# Altium PCB board.PcbDoc
Units mm, origin at the board's own origin, x right, y up, seen from the top; angles counter-clockwise.
Board outline 48.75 x 18.5 mm, 2 copper layers (Top Layer, Bottom Layer), stack 1.57 mm thick; 63 components, 46 nets, 233 pads, 90 vias.
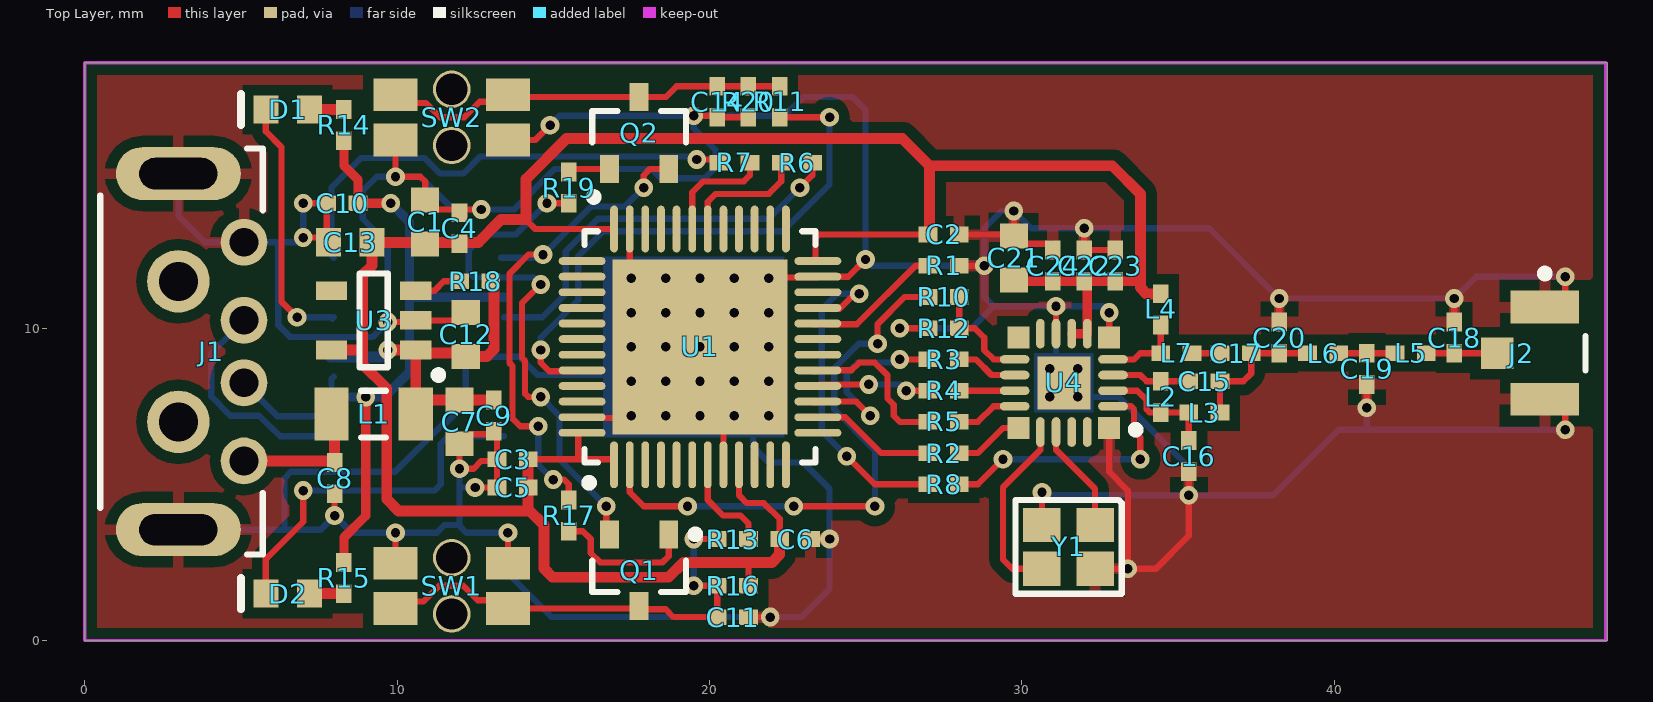
[diagram p0: Top Layer view]
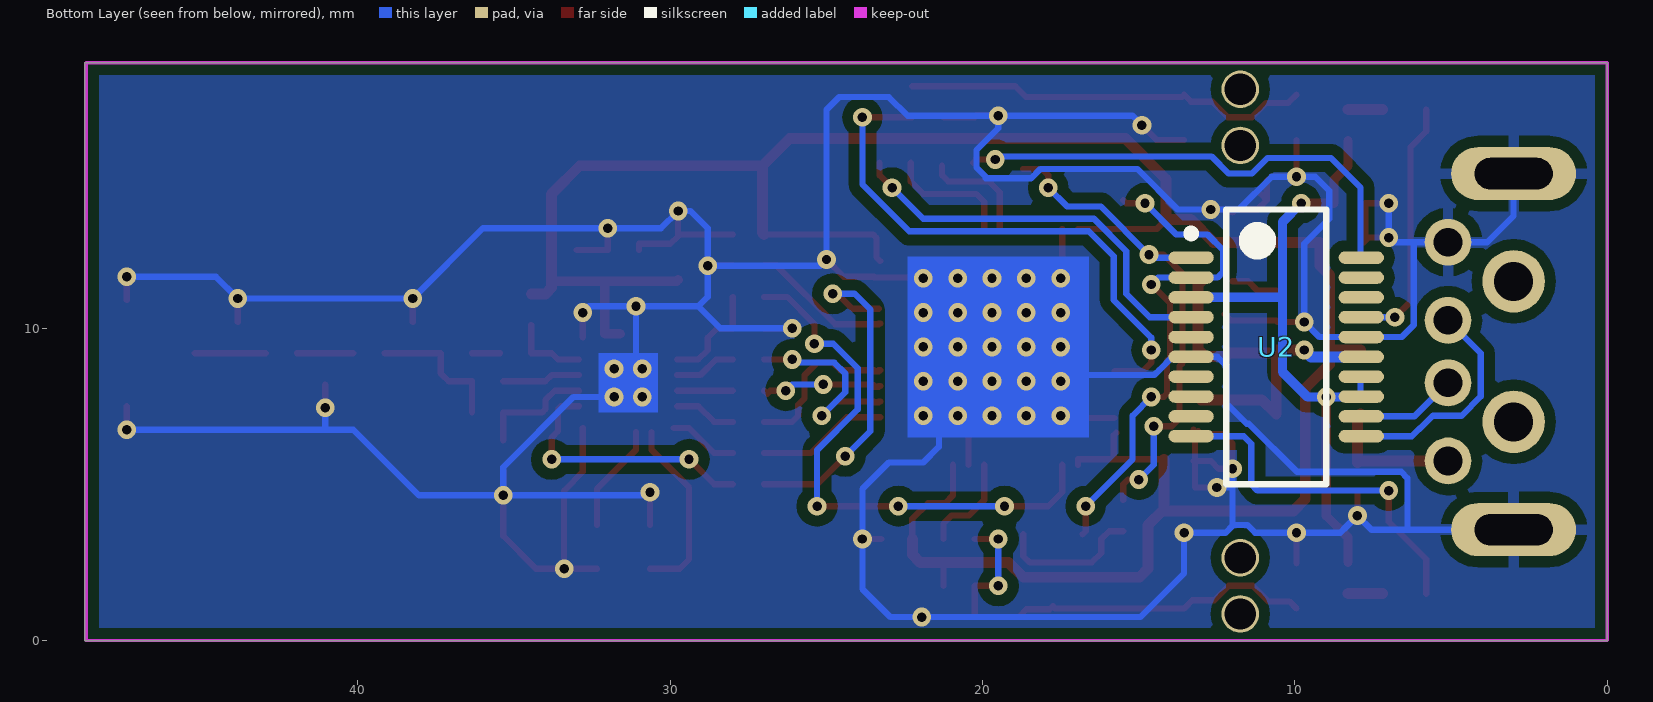
[diagram p1: Bottom Layer view, seen from below]
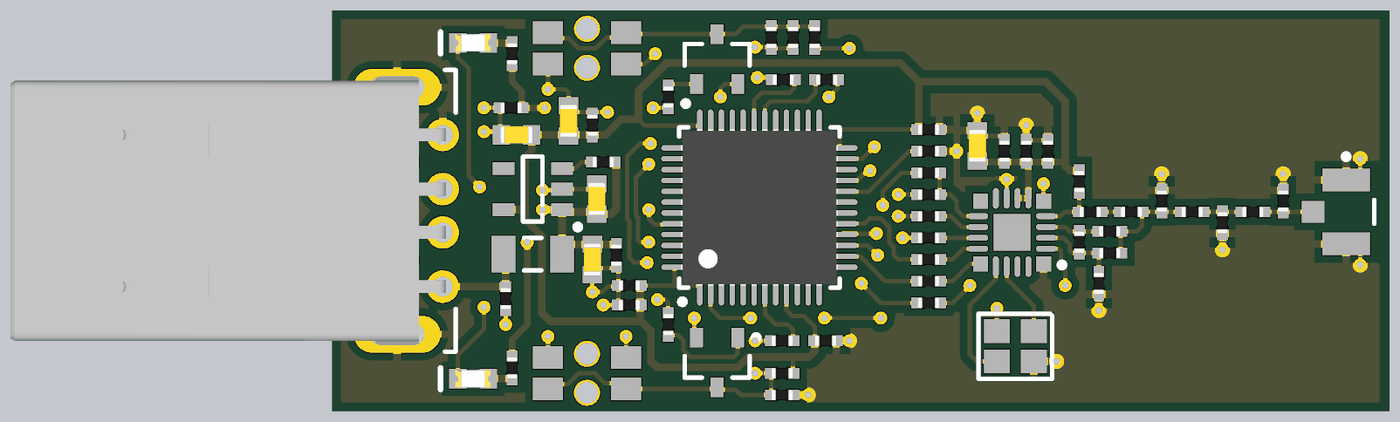
[diagram p2: 3D render of the assembled board from above, using the file's embedded part models]

## Layer stack, top to bottom
Top Solder: solder mask 0.01, Solder Resist, Dk 3.5
Top Layer: signal copper 0.035
Dielectric1: core 1.5, FR-4, Dk 4.2
Bottom Layer: signal copper 0.035
Bottom Solder: solder mask 0.01, Solder Resist, Dk 3.5

## Board outline
0,0 0,18.5 48.75,18.5 48.75,0

## Design rules (kind name [scope] priority, off if disabled: settings)
AssemblyTestPointUsage [All] p1 off:
Clearance [All] p1: gap=0.2 ignorepadtopadclearanceinfootprint=FALSE except(0.35: Arc-Fill Arc-Poly Arc-Region Track-Fill Track-Poly Track-Region SMDPad-Fill SMDPad-Poly SMDPad-Region THPad-Fill THPad-Poly THPad-Region Via-Fill Via-Poly Via-Region Fill-Fill Fill-Poly Fill-Region Poly-Poly Poly-Region Region-Region)
ComponentClearance ComponentClearance_logo [HasFootprint('Develer_logo_30x12mm_PCB_NOTE') vs HasFootprint('Develer_logo_30x12mm_TB_Top')] p1: gap=0 collisioncheckmode=3 verticalgap=0 showdistances=FALSE
ComponentClearance [All] p2: gap=0.25 collisioncheckmode=3 verticalgap=0.25 showdistances=FALSE
DiffPairsRouting [All] p1: maxlimit=0.2 minlimit=0.2 mostfreqgap=0.2 toplayer_minwidth=0.2 toplayer_maxwidth=0.2 toplayer_prefwidth=0.2 bottomlayer_minwidth=0.2 bottomlayer_maxwidth=0.2 bottomlayer_prefwidth=0.2 maxuncoupledlength=12.7
FabricationTestPointUsage [All] p1 off: valid=0 allowmultiple=FALSE
Height [All] p1: minheight=0 maxheight=25 prefheight=12.5
HoleSize [All] p1: absolutevalues=TRUE maxlimit=10 minlimit=0.2 maxpercent=80.000 minpercent=20.000
HoleToHoleClearance [All] p1: gap=0.25 allowstackedmicrovias=TRUE
MinimumSolderMaskSliver [All] p1: minsoldermaskwidth=0.1
PlaneClearance [All] p1: clearance=0.5
PlaneConnect PlaneConnect_via [isvia] p1: planeconnectstyle=Direct reliefexpansion=0.508 reliefentries=4 reliefconductorwidth=0.254 reliefairgap=0.254
PlaneConnect [All] p2: planeconnectstyle=Relief reliefexpansion=0.6 reliefentries=4 reliefconductorwidth=0.6 reliefairgap=0.3
PolygonConnect PolygonConnect_via [isvia] p1: connectstyle=Direct reliefconductorwidth=0.254 reliefentries=4 polygonreliefangle="90 Angle" airgapwidth=0.254
PolygonConnect [All] p2: connectstyle=Relief reliefconductorwidth=0.35 reliefentries=4 polygonreliefangle="90 Angle" airgapwidth=0.35
RoutingCorners [All] p1: cornerstyle=45-Degree minsetback=2.5 maxsetback=2.5
RoutingVias [All] p1: holewidth=0.3 width=0.6 viastyle="Through Hole" minholewidth=0.2 minwidth=0.3 maxholewidth=0.5 maxwidth=1
SilkToSilkClearance [All] p1: silktosilkclearance=0.15
SilkToSolderMaskClearance [IsPad] p1: minsilkscreentomaskgap=0.15 clearancetoexposedcopper=TRUE
SolderMaskExpansion SolderMaskExpansion_via [isVia] p1: expansion=-10
SolderMaskExpansion [All] p2: expansion=0.05
UnRoutedNet [All] p1: checkbadconnections=TRUE
Width [All] p1: maxlimit=5 minlimit=0.15 preferedwidth=0.2
16 further rules are at their usual default settings.

## Classes and differential pairs
component class radio: C15 C16 C17 C18 C19 C20 C21 C22 C23 C24 J2 L2 L3 L4 L5 L6 L7 U4 Y1
component class power: C7 C8 C9 C10 C11 C12 C13 C14 D1 D2 J1 L1 Q1 Q2 R14 R15 R16 R17 R18 R19 R20 SW1 SW2 U3
component class microcontroller: C1 C2 C3 C4 C5 C6 R1 R2 R3 R4 R5 R6 R7 R8 R10 R11 R12 R13 U1
differential pair usb: +usb_p -usb_n

## Components (designator, comment, footprint, x,y, rotation, side; value= is the part's Value field where it differs from the comment)
C1 "4.7uF" 0603_[1608] 10.9,13.4 r90 top
C2 "100nF" 0402_[1005] 27.5,13 r180 top
C3 "100nF" 0402_[1005] 13.7,5.8 r0 top
C4 "100nF" 0402_[1005] 12,13.2 r270 top
C5 "100nF" 0402_[1005] 13.7,4.9 r0 top
C6 "100nF" 0402_[1005] 22.75,3.25 r180 top
C7 "4.7uF" 0603_[1608] 12,7 r270 top
C8 "10nF" 0402_[1005] 8,5.2 r90 top
C9 "100nF" 0402_[1005] 13.1,7.2 r90 top
C10 "100nF" 0402_[1005] 8.25,14 r0 top
C11 "100nF" 0402_[1005] 20.75,0.75 r180 top
C12 "1uF" 0603_[1608] 12.2,9.8 r270 top
C13 "1uF" 0603_[1608] 8.5,12.75 r0 top
C14 "100nF" 0402_[1005] 20.25,17.25 r90 top
C15 "1.2pF" 0402_[1005] 35.85,8.3 r180 top
C16 "3.0pF" 0402_[1005] 35.35,5.9 r90 top
C17 "33pF" 0402_[1005] 36.85,9.2 r180 top
C18 "5.1pF" 0402_[1005] 43.85,9.7 r270 top
C19 "10pF" 0402_[1005] 41.05,8.7 r90 top
C20 "5.1pF" 0402_[1005] 38.25,9.7 r270 top
C21 "2.2uF" 0603_[1608] 29.75,12.25 r270 top
C22 "100nF" 0402_[1005] 32,12 r270 top
C23 "100pF" 0402_[1005] 33,12 r270 top
C24 "33pF" 0402_[1005] 31,12 r270 top
D1 "GREEN" 0603_[1608]_K2-A1_LED 6.5,17 r180 top
D2 "BLUE" 0603_[1608]_K2-A1_LED 6.5,1.5 r180 top
J1 "USB Type-A" MOLEX-48037-0001 3,9.25 r270 top
J2 "u.FL" U.FL_COAXIAL_2.6x2.6MM_STRAIGHT_SMD 46.75,9.2 r270 top
L1 "220 ohm @ 100MHz" 1206_[3216] 9.25,7.25 r0 top
L2 "18nH" 0402_[1005] 34.45,7.8 r90 top
L3 "22nH" 0402_[1005] 35.85,7.3 r180 top
L4 "120nH" 0402_[1005] 34.45,10.6 r90 top
L5 "6.8nH" 0402_[1005] 42.45,9.2 r180 top
L6 "6.8nH" 0402_[1005] 39.65,9.2 r180 top
L7 "8.2nH" 0402_[1005] 34.95,9.2 r180 top
Q1 "BC817" SOT95P230X110-3N 17.75,2.25 r270 top
Q2 "BC817" SOT95P230X110-3N 17.75,16.25 r90 top
R1 "10k" 0402_[1005] 27.5,12 r0 top
R2 "22" 0402_[1005] 27.5,6 r180 top
R3 "22" 0402_[1005] 27.5,9 r180 top
R4 "22" 0402_[1005] 27.5,8 r180 top
R5 "22" 0402_[1005] 27.5,7 r180 top
R6 "22" 0402_[1005] 22.8,15.3 r180 top
R7 "22" 0402_[1005] 20.8,15.3 r0 top
R8 "22" 0402_[1005] 27.5,5 r0 top
R10 "22" 0402_[1005] 27.5,11 r0 top
R11 "22" 0402_[1005] 22.25,17.25 r270 top
R12 "10k" 0402_[1005] 27.5,10 r0 top
R13 "22" 0402_[1005] 20.75,3.25 r0 top
R14 "270" 0402_[1005] 8.3,16.5 r270 top
R15 "270" 0402_[1005] 8.3,2 r90 top
R16 "10k" 0402_[1005] 20.75,1.75 r0 top
R17 "10k" 0402_[1005] 15.5,4 r90 top
R18 "10k" 0402_[1005] 12.5,11.5 r180 top
R19 "10k" 0402_[1005] 15.5,14.5 r270 top
R20 "10k" 0402_[1005] 21.25,17.25 r270 top
SW1 "RESET" EVQP7A 11.75,1.75 r0 top
SW2 "BOOT" EVQP7A 11.75,16.75 r180 top
U1 "STM32L15xCxx6" QFN50P700X700X60_HS-49N 19.7,9.4 r90 top
U2 "FT231XS" SOP64P600X180-20N 10.6,9.4 r180 bottom
U3 "MIC5504-3.3YM5" SOT95P280X145-5N 9.25,10.25 r180 top
U4 "Si4455" QFN50P300X300X90_HS-21N 31.35,8.25 r180 top
Y1 "26MHz" CRYSTAL_2.5X2MM_4P_SMD 31.5,3 r180 top

## Footprints (in the part's own frame and the unit in brackets; to place one, negate y for a bottom-side part, rotate by r counter-clockwise, add the part's x,y. Pads: shape width x height; smd on the part's side, far side on the other; paste and mask are expansions set on the pad)
0402_[1005] [mm] "Chip Capacitor, Body 1.0x0.5mm, IPC High Density"
  rect 0.6x0.5 smd: 1(-0.5,0) 2(0.5,0)
  body extent -0.5,-0.25 0.5,0.25, height 0.42
0603_[1608] [mm] "Chip Capacitor, Body 1.6x0.8mm, IPC High Density"
  rect 0.8x0.9 smd: 1(-0.7,0) 2(0.7,0)
  body extent -0.75,-0.4 0.75,0.4, height 0.67
0603_[1608]_K2-A1_LED [mm] "SMD led 0603 size"
  rect 0.8x0.9 smd: 1(-0.7,0) 2(0.7,0)
  silkscreen extent 1.5,-0.5 1.5,0.5, body extent -0.8,-0.4 0.8,0.4, height 0.7
1206_[3216] [mm] "Chip Capacitor, Body 3.2x1.6mm, IPC High Density"
  rect 1.1x1.7 smd: 1(-1.35,0) 2(1.35,0)
  silkscreen extent -0.4,-0.75 0.4,0.75, body extent -1.7,-0.9 1.7,0.9, height 1.3
CRYSTAL_2.5X2MM_4P_SMD [mm] "quarz crystal smd 4 lead"
  rect 1.2x1.1 smd: 1(-0.85,-0.7) 2(0.85,-0.7) 3(0.85,0.7) 4(-0.85,0.7)
  silkscreen extent -1.7,-1.5 1.7,1.5, body extent -1.27,-0.92 1.23,1.08, height 1.25
EVQP7A [mm] "3.5mm x 2.9mm side-operational SMD light touch switches"
  rect 1.4x1.05 smd: 1(-1.8,0.725) 2(-1.8,-0.725) 3(1.8,0.725) 4(1.8,-0.725)
  round 1.2 hole 1: Hole(0,-0.9) Hole(0,0.9)
MOLEX-48037-0001 [mm] "Universal Serial Bus (USB) Shielded I/O Plug, Type A, Right Angle, Through Hole, 0.76µm Gold (Au) Plating, PCB Thickness 1.20mm-1.60mm, Lead-Free"
  round 1.5 hole 0.92: 1(3.5,2.1) 2(1,2.1) 3(-1,2.1) 4(-3.5,2.1)
  round 2 hole 1.25: Hole(-2.25,0) Hole(2.25,0)
  rrect100% 1.7x4 hole 1 slot 2.5 at 90 deg: Z1(-5.7,0) Z2(5.7,0)
  silkscreen extent -6.5,-2.5 6.5,2.7, body extent -6.35,-17.8 6.35,2.23, height 3.25
QFN50P300X300X90_HS-21N [mm] "QFN, 20-Leads, Body 3.00x3.00mm, Pitch 0.50mm, Thermal Pad 1.70x1.70mm, IPC Medium Density"
  rect 0.7x0.7 smd: 1(-1.45,1.45) 6(-1.45,-1.45) 11(1.45,-1.45) 16(1.45,1.45)
  oval 0.95x0.275 smd: 2(-1.575,0.75) 3(-1.575,0.25) 4(-1.575,-0.25) 5(-1.575,-0.75) 12(1.575,-0.75) 13(1.575,-0.25) 14(1.575,0.25) 15(1.575,0.75)
  oval 0.275x0.95 smd: 7(-0.75,-1.575) 8(-0.25,-1.575) 9(0.25,-1.575) 10(0.75,-1.575) 17(0.75,1.575) 18(0.25,1.575) 19(-0.25,1.575) 20(-0.75,1.575)
  rect 1.7x1.7 smd: 21(0,0)
  silkscreen extent -2.43,1.38 -2.18,1.62, body extent -1.5,-1.5 1.5,1.5, height 0.9
QFN50P700X700X60_HS-49N [mm] "QFN, 48-Leads, Body 7,00x7,00mm, Pitch 0,50mm, Thermal Pad 5,60x5,60mm, IPC Medium Density"
  oval 1.5x0.25 smd: 1(-3.775,2.75) 2(-3.775,2.25) 3(-3.775,1.75) 4(-3.775,1.25) 5(-3.775,0.75) 6(-3.775,0.25) 7(-3.775,-0.25) 8(-3.775,-0.75) 9(-3.775,-1.25) 10(-3.775,-1.75) 11(-3.775,-2.25) 12(-3.775,-2.75) 25(3.775,-2.75) 26(3.775,-2.25) 27(3.775,-1.75) 28(3.775,-1.25) 29(3.775,-0.75) 30(3.775,-0.25) 31(3.775,0.25) 32(3.775,0.75) 33(3.775,1.25) 34(3.775,1.75) 35(3.775,2.25) 36(3.775,2.75)
  oval 0.25x1.5 smd: 13(-2.75,-3.775) 14(-2.25,-3.775) 15(-1.75,-3.775) 16(-1.25,-3.775) 17(-0.75,-3.775) 18(-0.25,-3.775) 19(0.25,-3.775) 20(0.75,-3.775) 21(1.25,-3.775) 22(1.75,-3.775) 23(2.25,-3.775) 24(2.75,-3.775) 37(2.75,3.775) 38(2.25,3.775) 39(1.75,3.775) 40(1.25,3.775) 41(0.75,3.775) 42(0.25,3.775) 43(-0.25,3.775) 44(-0.75,3.775) 45(-1.25,3.775) 46(-1.75,3.775) 47(-2.25,3.775) 48(-2.75,3.775)
  rect 5.6x5.6 smd: 49(0,0)
  silkscreen extent -4.47,-3.7 3.7,3.7, body extent -3.6,-3.6 3.6,3.6, height 0.6
SOP64P600X180-20N [mm] "SOP, 20-Leads, Body 8.65x3.90mm, Pitch 0.64mm, IPC Medium Density"
  oval 1.45x0.4 smd: 1(-2.725,2.858) 2(-2.725,2.223) 3(-2.725,1.588) 4(-2.725,0.953) 5(-2.725,0.318) 6(-2.725,-0.317) 7(-2.725,-0.952) 8(-2.725,-1.587) 9(-2.725,-2.222) 10(-2.725,-2.857) 11(2.725,-2.858) 12(2.725,-2.223) 13(2.725,-1.588) 14(2.725,-0.953) 15(2.725,-0.318) 16(2.725,0.317) 17(2.725,0.952) 18(2.725,1.587) 19(2.725,2.222) 20(2.725,2.857)
  silkscreen extent -2.85,-4.4 1.6,4.4, body extent -2,-4.4 2,4.4, height 1.8
SOT95P230X110-3N [mm] "SOT23, 3-Leads, Body 2.90x2.30mm, Pitch 0.95mm, IPC Medium Density"
  rect 0.9x0.6 smd: 1(-1.15,0.95) 2(-1.15,-0.95) 3(1.15,0)
  silkscreen extent -1.27,-1.5 0.7,1.93, body extent -0.7,-1.5 0.7,1.5, height 1.1
SOT95P280X145-5N [mm] "SOT23, 5-Leads, Body 2.90x2.80mm, Pitch 0.95mm, IPC Medium Density"
  rect 1x0.6 smd: 1(-1.35,0.95) 2(-1.35,0) 3(-1.35,-0.95) 4(1.35,0.95) NC(1.35,-0.95)
  silkscreen extent -2.2,-1.5 0.45,1.87, body extent -0.85,-1.5 0.85,1.5, height 1.45
U.FL_COAXIAL_2.6x2.6MM_STRAIGHT_SMD [mm] "SMD, 3-Leads, Body 2.6x2.6mm (HRS-U.FL-R-SMT-1(10)_V)"
  rect 1.05x2.2 smd: 1(-1.475,0) 2(1.475,0)
  rect 1x1.05 smd: 3(0,-1.525)
  silkscreen extent -2.67,-0.12 0.55,1.3, body extent -1.3,-1.3 1.3,1.3, height 1.25

## Part data
C1 C7: library part CPOL, "Polarized capacitor"
C2 C3 C4 C5 C6 C8 C9 C10 C11 C12 C13 C14 C15 C16 C17 C18 C19 C20 C21 C22 C23 C24: library part C, "Capacitor"
D1 D2: library part LED, "Light-emitting diode, 2 pins"
J1: library part USB-A
J2: "u.FL antenna connector"
L1 L2 L3 L4 L5 L6 L7: library part L, "Inductor"
Q1 Q2: "BJT NPN transistor"
R1 R2 R3 R4 R5 R6 R7 R8 R10 R11 R12 R13 R14 R15 R16 R17 R18 R19 R20: library part R, "Resistor"
SW1 SW2: library part SW-PB-4P, "Switch, push-button, SPST, 4 pins"
U1: "Ultra-low-power 32-bit MCU ARM®-based Cortex®-M3, 128KB Flash, 16KB SRAM, 4KB EEPROM, LCD, USB, ADC, DAC"
U2: library part FT231x, "USB to full-handshake UART IC"
U3: library part MIC550x, "Single 300mA LDO voltage regulator"
U4: "Low-current OOK/(G)FSK sub-GHz transceiver"
Y1: library part XTAL-4, "Crystal oscillator, 4-pin"

## Free pads (board coordinates)
  round 6 hole 3.2: Hole(-52.25,-33.25)

## Via types
v1: diameter 0.6, hole 0.3, Top Layer to Bottom Layer, 89 vias
v2: diameter 0.6, hole 0.3, Top Layer to Bottom Layer, tented both sides, 1 vias

## Nets (pads, with @x,y where several pads share a name; then routed paths per layer and width w, separated by ;. In a path a pad name is that pad's centre, name@x,y a point inside that pad or via, vN(x,y) a via of type N, cw(c..) or ccw(c..) an arc to the next point about the centre after c; other vN are vias at no path point)
3V3: C1.1 C2.2 C3.2 C4.2 C5.2 C6.2 C13.2 C21.2 C22.2 C23.2 C24.2 L4.2 R16.2 U1.1 U1.9 U1.24 U1.36 U1.48 U3.4 U4.7 U4.8 | length 81.4
  Top Layer w0.2: 14.125,13.475 14.425,13.175 U1.36 ; C3.2 15.799,5.8 ; U1.48@15.725,6.65 15.799,6.576 15.799,5.8 ; U1.1 16.95,5.8 15.799,5.8 ; U1.9 20.95,4.65 21.2,4.4 21.745,4.4 22.25,3.895 C6.2 ; R16.2 21.25,2.5 ; U1.24@23.275,12.15 23.4,12.275 23.4,12.9 23.5,13 C2.2
  Top Layer w0.3: C21.2 29.8,11.5 C24.2 C22.2 ; U4.8 U4.7 32.1,11.4 C22.2 ; 33.8,11.5 C23.2 C22.2
  Top Layer w0.35: U3.4 8.9,9.3 ; C3.2 C5.2 14.2,4.2 ; C6.2 22.25,2.75 22,2.5 21.25,2.5 19.172,2.5 18.697,2.025 14.975,2.025 14.7,2.3 14.7,3.7 14.2,4.2 ; C2.2 27.05,13.05 27.05,15.2 ; L4.2 34,11.1 33.8,11.3 33.8,11.5 33.8,14.3 32.9,15.2 27.05,15.2 ; 8.9,9.3 8.9,8.845 9.67,8.075 9.67,4.53 10.05,4.15 14.15,4.15 14.2,4.2 ; 8.9,9.3 8.9,11.7 9.2,12 C13.2 12.605,12.75 13.33,13.475 14.125,13.475 14.125,14.77 15.43,16.075 26.175,16.075 27.05,15.2
3v3_F: C10.2 R14.2 R15.2 U2.3 U2.13 U2.14 | length 21.1
  Top Layer w0.3: R15.2 8.3,3.3 8.995,3.995 v1(8.995,7.795) ; R14.2 8.3,15.2 8.75,14.75 C10.2 v1@9.9,14
  Bottom Layer w0.2: U2.13@7.9,7.888 7.9,8.372 U2.14@7.975,8.447
  Bottom Layer w0.3: U2.13@7.9,7.888 7.992,7.795 v1(8.995,7.795) 9.595,7.795 10.4,8.6 10.4,11 ; v1(9.8,14) 10.4,13.4 10.4,11 ; U2.3@13.425,10.987 U2.3 10.413,10.987 10.4,11
BOOT0: C14.2 Q2.3 R11.1 R20.1 SW2.2 SW2.4 | length 13.1
  Top Layer w0.2: SW2.4 10.211,17.214 10.914,17.214 11.377,16.75 12.15,16.75 12.65,17.25 13.325,17.25 SW2.2 13.625,17.4 Q2.3 18.6,17.4 18.95,17.75 C14.2 R11.1
DRX: R7.1 U2.20 | length 15.6
  Top Layer w0.2: v1(19.6,15.4) 20.2,15.4 R7.1
  Bottom Layer w0.2: U2.20@7.975,12.257 7.9,12.333 7.9,14.5 8.85,15.45 10.877,15.45 11.377,14.95 12.123,14.95 12.673,15.5 19.5,15.5 v1(19.6,15.4)
DTX: R6.1 U2.4 | length 13
  Top Layer w0.2: v1(22.9,14.5) 23.3,14.9 R6.1
  Bottom Layer w0.2: U2.4@13.425,10.352 14.653,10.352 15.4,11.1 15.4,12.134 15.4,12.466 16.434,13.5 21.9,13.5 v1(22.9,14.5)
FTDI_DTR: Q2.2 R17.2 U2.1 | length 16.7
  Top Layer w0.2: v1(14.525,6.857) 13.943,6.857 13.7,7.1 13.7,8.786 13.6,8.886 13.6,11.749 14.208,12.356 v1(14.675,12.356) ; v1(15,5.151) 15.349,5.151 15.5,5 R17.2 ; v1(17.9,14.5) 17.9,14.9 18.1,15.1 Q2.2
  Bottom Layer w0.2: U2.1 14.576,12.257 v1(14.675,12.356) 16.219,13.9 17.3,13.9 v1(17.9,14.5) ; v1(14.525,6.857) 14.525,5.626 v1(15,5.151)
FTDI_RTS: Q1.2 R19.2 U2.2 | length 16.7
  Top Layer w0.2: v1(14.6,7.8) 14.2,7.8 14.1,7.9 14.1,8.952 14,9.051 14,10.8 v1(14.6,11.4) ; v1(14.8,14) 15.4,14 R19.2@15.5,14.1 ; v1(16.7,4.3) 16.7,3.5 Q1.2
  Bottom Layer w0.2: v1(14.6,7.8) 15.2,7.2 15.2,5.8 v1(16.7,4.3) ; v1(14.6,11.4) 14.377,11.622 U2.2 12.478,11.622 12.3,11.8 12.3,12.5 12.8,13 13.8,13 v1(14.8,14)
GND: C1.2 C2.1 C3.1 C4.1 C5.1 C6.1 C7.2 C8.1 C9.1 C10.1 C11.1 C12.1 C13.1 C14.1 C16.1 C18.1 C19.1 C20.1 C21.1 C22.1 C23.1 C24.1 J1.4 J1.Z1 J1.Z2 J2.1 J2.2 R1.2 R12.1 R20.2 SW1.1 SW1.3 SW2.1 SW2.3 U1.8 U1.23 U1.35 U1.47 U1.49 U2.6 U2.16 U3.2 U4.1 U4.6 U4.9 U4.21 Y1.2 Y1.4 | length 226.4
  Top Layer w0.2: v1(7,12.9) 7.65,12.9 C13.1@7.75,12.8 ; v1(7,14) C10.1 C13.1@7.75,12.8 ; C13.1 C13.1@7.75,12.8 ; v1(8,4) C8.1 ; v1(9.7,10.2) 10.55,10.2 U3.2 12.05,10.25 C12.1@12.25,10.45 ; SW1.1 v1(9.95,3.45) ; SW2.3 v1(9.95,14.85) 10.75,14.85 10.9,14.7 C1.2 ; C1.2@11.1,14.3 C1.2 ; v1(12.5,4.9) C5.1 C3.1@13.2,5.75 ; v1(12.7,13.8) 12.1,13.8 C4.1 11.9,13.8 11.2,13.8 C1.2 ; C9.1 C9.1@13.15,6.65 ; C3.1@13.25,5.75 C3.1@13.2,5.75 ; C9.1@13.25,6.75 C9.1@13.15,6.65 ; SW1.3 v1(13.55,3.45) ; SW2.1 14.425,16.025 v1(14.9,16.5) ; U1.47@15.775,7.125 U1.49@17.3,7.125 ; U1.49@17.25,7.15 U1.49@18.4,8.3 ; U1.35 17.45,11.65 v1(17.5,11.6) v1(18.6,10.5) v1(19.7,9.4) ; U1.49@18.549,8.387 19.6,9 19.73,9.195 20.3,8.625 20.3,7.8 20.45,7.65 U1.8 ; v1(19.5,16.8) 20.2,16.8 C14.1 R20.2 ; U1.49@19.815,9.323 20.6,10.5 U1.49@21.75,11.65 ; C11.1 v1(21.95,0.75) ; U1.49@21.8,11.625 U1.23@23.475,11.625 ; C6.1 v1(23.85,3.25) ; U1.23 24.45,11.65 v1(25,12.2) ; v1(26.1,10) R12.1 ; R1.2 v1(28.8,12) ; C2.1 29.7,13 C21.1 ; v1(29.75,13.75) C21.1 ; Y1.2 v1(30.65,4.75) ; C24.1 31,12.7 30,12.7 C21.1 ; U4.9 v1(31.1,10.7) ; v1(32,13.2) C22.1 C23.1 ; Y1.4 v1(33.4,2.3) ; U4.1 32.8,5.4 33.4,4.8 v1(33.4,2.3) ; U4.6 v1(32.8,10.5) ; C16.1 v1(35.35,4.65) 35.35,3.35 34.3,2.3 v1(33.4,2.3) ; C20.1 v1(38.25,10.95) ; v1(41.05,7.45) C19.1 ; C18.1 v1(43.85,10.95) ; v1(47.4,6.75) J2.2@47.4,7.5 ; J2.1@47.4,10.9 v1(47.4,11.65) ; C9.1@13.15,6.65 13.1,6.6 12.3,6.6 C7.2 v1(12,5.5) 12.45,5.5 12.7,5.75 C3.1@13.2,5.75 ; C9.1@13.15,6.65 13.2,6.6 C3.1 C3.1@13.2,5.75
  Bottom Layer w0.2: J1.Z2 6.4,3.55 ; J1.Z1 3,13.6 3.85,12.75 J1.4 6.2,12.75 ; v1(7,14) v1(7,12.9) 6.85,12.75 6.2,12.75 ; v1(12,5.5) 12,4.9 ; v1(12.5,4.9) 12,4.9 ; v1(14.9,16.5) 15.2,16.8 v1(19.5,16.8) ; 17,8.5 14.5,8.5 14.35,8.65 14.35,8.655 13.922,9.082 U2.6 12.482,9.082 12.2,8.8 12.2,7.6 11.542,6.942 11.477,6.942 9.934,5.4 6.6,5.4 6.4,5.2 6.4,3.55 ; 21.4,7.3 21.4,6.2 21.9,5.7 23,5.7 23.85,4.85 v1(23.85,3.25) 23.85,1.65 22.95,0.75 v1(21.95,0.75) 14.95,0.75 13.55,2.15 v1(13.55,3.45) 12.223,3.45 12,3.673 ; v1(26.1,10) 28.4,10 29.1,10.7 ; v1(30.65,4.75) 30.75,4.65 v1(35.35,4.65) ; v1(30.9,7.8) v1(31.8,7.8) ; v1(32.8,10.5) 32.6,10.7 v1(31.1,10.7) ; v1(41.05,7.45) 41.05,6.75 ; v1(47.4,6.75) 41.05,6.75 ; v1(47.4,11.65) 44.55,11.65 v1(43.85,10.95) v1(38.25,10.95) 36,13.2 30.3,13.2 v1(29.75,13.75) 29.35,13.75 28.8,13.2 v1(28.8,12) ; 6.2,12.75 6.2,10.101 6.584,9.717 U2.16 9.217,9.717 v1(9.7,10.2) 9.7,12.7 8.9,13.5 8.9,14.4 9.35,14.85 v1(9.95,14.85) 10.75,14.85 11.8,13.8 v1(12.7,13.8) 13.751,13.8 15.051,15.1 18.148,15.1 18.448,14.8 19.9,14.8 19.9,14.851 20.2,15.151 20.2,15.7 19.5,16.4 v1(19.5,16.8) ; 6.4,3.55 7.55,3.55 v1(8,4) 8.35,3.65 8.55,3.45 v1(9.95,3.45) 11.277,3.45 11.527,3.7 11.973,3.7 12,3.673 ; 12,3.673 12,4.9 ; v1(19.5,16.8) 22.4,16.8 23,17.4 24.6,17.4 25,17 v1(25,12.2) 25.2,12 25.6,12 v1(28.8,12) ; v1(28.8,12) 28.8,11 29.1,10.7 ; 29.1,10.7 v1(31.1,10.7) ; v1(31.1,10.7) 31.1,8.9 v1(30.9,8.7) v1(31.8,8.7) v1(31.8,7.8) ; v1(31.8,7.8) 33.1,7.8 35.35,5.55 v1(35.35,4.65) ; v1(35.35,4.65) 38.05,4.65 40.15,6.75 41.05,6.75
  other v1: 17.5,7.2 18.6,7.2 19.7,7.2 20.8,7.2 21.9,7.2 17.5,8.3 18.6,8.3 19.7,8.3 20.8,8.3 21.9,8.3 17.5,9.4 18.6,9.4 20.8,9.4 21.9,9.4 17.5,10.5 19.7,10.5 20.8,10.5 21.9,10.5 18.6,11.6 19.7,11.6 20.8,11.6 21.9,11.6
NetC8_2: C8.2 J1.1 L1.1 | length 4.5
  Top Layer w0.35: J1.1 7.95,5.75 C8.2 8,7.15 L1.1
NetC15_1: C15.1 C17.1 C20.2 L3.1 L6.2 | length 4.6
  Top Layer w0.2: L3.1 C15.1 37.1,8.3 37.35,8.55 C17.1 C20.2 L6.2
NetC15_2: C15.2 L2.2 U4.4 | length 2.5
  Top Layer w0.2: U4.4 33.8,8.5 34,8.3 L2.2 C15.2
NetC16_2: C16.2 L2.1 L3.2 U4.3 | length 3.8
  Top Layer w0.2: U4.3 33.7,8 34,7.7 34,7.4 34.1,7.3 L2.1 L3.2 C16.2
NetC17_2: C17.2 L7.1 | length 0.9
  Top Layer w0.2: L7.1 C17.2
NetC18_2: C18.2 J2.3 L5.1 | length 2.3
  Top Layer w0.2: L5.1 C18.2 J2.3
NetC19_2: C19.2 L5.2 L6.1 | length 1.8
  Top Layer w0.2: L6.1 L5.2
NetD1_1: D1.1 R14.1 | length 1.1
  Top Layer w0.35: D1.1 R14.1
NetD1_2: D1.2 U2.17 | length 8.3
  Top Layer w0.2: D1.2 5.8,16.3 6.3,15.8 6.3,10.85 v1(6.8,10.35)
  Bottom Layer w0.2: v1(6.8,10.35) 7.873,10.35 7.923,10.3 U2.17@7.975,10.352
NetD2_1: D2.1 R15.1 | length 1.1
  Top Layer w0.35: D2.1 R15.1
NetD2_2: D2.2 U2.10 | length 11.7
  Top Layer w0.2: D2.2 5.8,2.6 7,3.8 v1(7,4.8)
  Bottom Layer w0.2: v1(7,4.8) 11.2,4.8 11.4,5 11.4,6.3 11.642,6.542 U2.10 U2.10@13.425,6.542
NetL4_1: L4.1 L7.2 U4.5 | length 2.5
  Top Layer w0.2: U4.5 33.6,9 33.8,9.2 L7.2 L4.1
NetQ1_1: Q1.1 R17.1 | length 4.7
  Top Layer w0.2: R17.1 15.95,3.5 16.2,3.25 16.2,2.8 16.5,2.5 18.5,2.5 18.7,2.7 Q1.1
NetQ2_1: Q2.1 R19.1 | length 1.3
  Top Layer w0.2: R19.1@15.5,15.1 Q2.1
NetR1_1: R1.1 U1.20 | length 4.5
  Top Layer w0.2: U1.20@23.275,10.15 U1.20@23.325,10.15 ; U1.20@23.325,10.125 24.725,10.125 26.6,12 R1.1
NetR2_2: R2.2 U1.14 | length 4.2
  Top Layer w0.2: U1.14@23.275,7.15 U1.14 24.35,7.15 25.5,6 R2.2
NetR3_2: R3.2 U1.15 | length 6.5
  Top Layer w0.2: U1.15@23.275,7.65 U1.15@23.325,7.65 ; U1.15@23.325,7.625 U1.15@23.475,7.625 ; U1.15 24.701,7.65 v1(25.151,7.2) ; v1(26.1,9) R3.2
  Bottom Layer w0.2: v1(25.151,7.2) 24.4,7.951 24.4,8.549 24.751,8.9 26,8.9 v1(26.1,9)
NetR4_2: R4.2 U1.16 | length 3.9
  Top Layer w0.2: U1.16@23.275,8.15 U1.16@23.325,8.15 ; U1.16@23.325,8.125 U1.16@23.475,8.125 ; U1.16 23.525,8.2 v1(25.1,8.2) ; v1(26.3,8) 26.8,8 26.9,7.9 R4.2
  Bottom Layer w0.2: v1(25.1,8.2) 26.1,8.2 v1(26.3,8)
NetR5_2: R5.2 U1.17 | length 5.3
  Top Layer w0.2: U1.17@23.275,8.65 U1.17@23.325,8.65 ; U1.17@23.325,8.625 U1.17@23.475,8.625 ; U1.17 24.55,8.65 24.8,8.9 25.3,8.9 25.7,8.5 25.7,7.751 25.9,7.551 25.9,7.2 26.1,7 R5.2
NetR6_2: R6.2 U1.30 | length 4.1
  Top Layer w0.2: U1.30 19.95,14.05 20.2,14.3 21.9,14.3 22.3,14.7 R6.2
NetR7_2: R7.2 U1.31 | length 3.6
  Top Layer w0.2: U1.31 19.45,14.35 19.8,14.7 21.1,14.7 21.3,14.9 R7.2@21.3,15.2
NetR8_1: R8.1 U1.21 | length 11.1
  Top Layer w0.2: U1.21@23.325,10.625 24.176,10.625 24.651,11.1 v1(24.8,11.1) ; v1(24.4,5.9) 25.3,5 R8.1
  Bottom Layer w0.2: v1(24.4,5.9) 23.6,6.7 23.6,10.6 24.1,11.1 v1(24.8,11.1)
NetR10_1: R10.1 U1.2 | length 18.2
  Top Layer w0.2: U1.2 17.45,4.75 17.9,4.3 v1(19.3,4.3) ; v1(22.7,4.3) v1(25.3,4.3) ; v1(25.386,9.5) 25.386,10.134 26.251,11 R10.1
  Bottom Layer w0.2: v1(19.3,4.3) v1(22.7,4.3) ; v1(25.3,4.3) 25.3,6.1 24,7.4 24,8.714 24.786,9.5 v1(25.386,9.5)
NetR11_2: R11.2 U1.44 | length 17.9
  Top Layer w0.2: v1(14.6,9.3) 14.6,8.9 14.875,8.625 U1.44@15.775,8.625 ; R11.2 v1(23.85,16.75)
  Bottom Layer w0.2: v1(14.6,9.3) 14.6,9.7 15.8,10.9 15.8,12.3 16.6,13.1 22.349,13.1 23.85,14.601 v1(23.85,16.75)
NetR13_2: R13.2 U1.7 | length 3.2
  Top Layer w0.2: U1.7 19.95,4.499 20.449,4 21,4 21.25,3.75 R13.2
NetR18_2: R18.2 U3.3 | length 1.5
  Top Layer w0.2: U3.3 11.2,11.2 11.5,11.5 R18.2
NetU4_17: U4.17 Y1.3 | length 5.9
  Top Layer w0.2: U4.17 30.6,6.1 29.4,4.9 29.4,2.6 29.7,2.3 Y1.3
NetU4_18: U4.18 Y1.1 | length 3.5
  Top Layer w0.2: U4.18 31.1,6.1 32.35,4.85 Y1.1
RESET: C11.2 Q1.3 R13.1 R16.1 SW1.2 SW1.4 | length 15.1
  Top Layer w0.2: SW1.2 10.175,1.25 10.85,1.25 11.35,1.75 12.123,1.75 12.586,1.286 13.289,1.286 SW1.4 17.675,1.025 Q1.3 17.85,1 18.6,1 18.85,0.75 C11.2 R16.1 v1(19.5,1.75) ; v1(19.5,3.25) R13.1
  Bottom Layer w0.2: v1(19.5,1.75) v1(19.5,3.25)
SI_IRQn: R10.2 R12.2 U4.12 | length 3.3
  Top Layer w0.2: R12.2 R10.2 ; R12.2@28.1,10 28.5,10 28.8,9.7 28.8,9.3 29.1,9 U4.12
SI_NSEL: R2.1 U4.16 | length 2.2
  Top Layer w0.2: R2.1 28.6,6 29.4,6.8 U4.16
SI_SCLK: R3.1 U4.13 | length 2
  Top Layer w0.2: R3.1 28.534,9 29.034,8.5 U4.13
SI_SDI: R5.1 U4.15 | length 2
  Top Layer w0.2: R5.1 28.6,7 29.1,7.5 U4.15
SI_SDN: R8.2 U4.2 | length 8.5
  Top Layer w0.2: R8.2 28.6,5 v1(29.4,5.8) ; U4.2 33.5,7.5 33.6,7.4 33.6,6.7 33.8,6.5 v1(33.8,5.8)
  Bottom Layer w0.2: v1(29.4,5.8) v1(33.8,5.8)
SI_SDO: R4.1 U4.14 | length 1.8
  Top Layer w0.2: R4.1 U4.14
usb_n: J1.2 U2.12 | length 3.2
  Bottom Layer w0.2: J1.2 6.172,7.177 U2.12
usb_p: J1.3 U2.11 | length 7.2
  Bottom Layer w0.2: J1.3 4.05,9.2 4.05,7.815 4.665,7.2 5.584,7.2 6.007,6.777 6.023,6.777 6.258,6.542 U2.11
Vusb: C7.1 C9.2 C12.2 L1.2 R18.1 U2.15 U3.1 | length 12.6
  Top Layer w0.35: v1(9.7,9.3) U3.1 ; R18.1 13.1,11.4 13.1,9.325 12.875,9.1 C12.2 12.1,9.2 10.7,9.2 U3.1 ; C9.2@13.1,7.8 13,7.7 C7.1 11.05,7.7 L1.2 U3.1
  Bottom Layer w0.35: U2.15 9.482,9.082 ; v1@9.582,9.182 9.482,9.082 ; v1(9.7,9.3) 9.483,9.082
pads on no net: J1.Hole SW1.Hole SW2.Hole U1.3 U1.4 U1.5 U1.6 U1.10 U1.11 U1.12 U1.13 U1.18 U1.19 U1.22 U1.25 U1.26 U1.27 U1.28 U1.29 U1.32 U1.33 U1.34 U1.37 U1.38 U1.39 U1.40 U1.41 U1.42 U1.43 U1.45 U1.46 U2.5 U2.7 U2.8 U2.9 U2.18 U2.19 U3.NC U4.10 U4.11 U4.19 U4.20
copper on no net:
  other v2: -47.25,-28.25

## Polygon pours and split planes (outlines as drawn)
GND on Bottom Layer "GND" (solid, remove dead copper, pour order 0): 0,18.5 48.75,18.5 48.75,0 0,0
GND on Top Layer "GND" (solid, remove dead copper, pour order 4): 0,18.5 48.75,18.5 48.75,0 0,0

## Keep-outs
Keep-Out Layer:
  lines w0.1: 0,0 0,18.5 48.7,18.5 48.7,0 0,0

## Other copper
Bottom Layer:
  rectangle net GND: 30.4,7.3 32.3,9.2
  rectangle net GND: 16.6,6.5 22.4,12.3

## Silkscreen, mask and mechanical layers (free items; w line width, h text height)
Outline:
  the board outline again, w0.2
Drawing:
  text "Mechanical Characteristics" at 141.25,-81.25 h5
Top Assembly:
  text "Assembly TOP" at 141.25,-81.25 h5
Bottom Assembly:
  text "Assembly Bottom" at -10.75,-81.25 h5
Top Note:
  text "Note TOP" at 141.25,-81.25 h5
Bottom Note:
  text "Note Bottom" at -10.75,-81.25 h5
PCB Note:
  drawing of 183 lines, arcs and shapes, not listed
  text "Plugged Vias" at 166.25,-13 h5
  text "File Layer names:" at 164.25,-16.25 h3.5
  text "GTO" at 164.25,-20.25 h3
  text "Top Overlay" at 173.25,-20.25 h3
  text "GTP" at 164.25,-23.25 h3
  text "Top Paste" at 173.25,-23.25 h3
  text "GTS" at 164.25,-26.25 h3
  text "Top Solder" at 173.25,-26.25 h3
  text "GTL" at 164.25,-29.25 h3
  text "Top Layer" at 173.25,-29.25 h3
  text "GBL" at 164.25,-32.25 h3
  text "Bottom Layer" at 173.25,-32.25 h3
  text "GBS" at 164.25,-35.25 h3
  text "Bottom Solder" at 173.25,-35.25 h3
  text "GBP" at 164.25,-38.25 h3
  text "Bottom Paste" at 173.25,-38.25 h3
  text "GBO" at 164.25,-41.25 h3
  text "Bottom Overlay" at 173.25,-41.25 h3
  text "GM1" at 164.25,-47.25 h3
  text "Outline" at 173.25,-47.25 h3
  text "GM7" at 164.25,-50.25 h3
  text "PCB_Note" at 173.25,-50.25 h3
  text "Layer" at 151.146,-53.961 h1.52
  text "Name" at 157.132,-53.961 h1.52
  text "Material" at 168.713,-53.961 h1.52
  text "Thickness" at 178.881,-53.961 h1.52
  text "Constant" at 187.339,-53.961 h1.52
  text "Board Layer Stack" at 195.264,-53.961 h1.52
  text "1" at 151.146,-57.009 h1.52
  text "Top Overlay" at 157.132,-57.009 h1.52
  text "2" at 151.146,-60.057 h1.52
  text "Top Solder" at 157.132,-60.057 h1.52
  text "Solder Resist" at 168.713,-60.057 h1.52
  text "0.39mil" at 178.881,-60.057 h1.52
  text "3.5" at 187.339,-60.057 h1.52
  text "3" at 151.146,-63.105 h1.52
  text "Top Layer" at 157.132,-63.105 h1.52
  text "Copper" at 168.713,-63.105 h1.52
  text "1.38mil" at 178.881,-63.105 h1.52
  text "4" at 151.146,-66.153 h1.52
  text "Dielectric1" at 157.132,-66.153 h1.52
  text "FR-4" at 168.713,-66.153 h1.52
  text "59.05mil" at 178.881,-66.153 h1.52
  text "4.2" at 187.339,-66.153 h1.52
  text "5" at 151.146,-69.201 h1.52
  text "Bottom Layer" at 157.132,-69.201 h1.52
  text "Copper" at 168.713,-69.201 h1.52
  text "1.38mil" at 178.881,-69.201 h1.52
  text "6" at 151.146,-72.249 h1.52
  text "Bottom Solder" at 157.132,-72.249 h1.52
  text "Solder Resist" at 168.713,-72.249 h1.52
  text "0.39mil" at 178.881,-72.249 h1.52
  text "3.5" at 187.339,-72.249 h1.52
  text "7" at 151.146,-75.297 h1.52
  text "Bottom Overlay" at 157.132,-75.297 h1.52
  text "PCB Note" at 141.25,-81.25 h5
  text "Board Name" at 141.25,-84.8 h3
  text ".ProjectTitle" at 157.25,-84.8 h3
  text "Author" at 141.25,-88.3 h3
  text "Pietro Lorefice" at 157.25,-88.3 h3
  text "Date" at 141.25,-91.9 h3
  text ".ProjectDate" at 157.25,-91.9 h3
  text "Revision" at 141.25,-95.5 h3
  text ".ProjectPCBRev" at 157.25,-95.5 h3
  text "A4" at 199.75,-95.5 h3
Top Titleblock:
  lines w0.3: 113.75,-96.25 113.75,-77.25 140.25,-77.25 ; 140.25,-96.25 140.25,-84.25 ; 140.25,-92.75 207.75,-92.75 ; 140.25,-89.25 207.75,-89.25 ; 140.25,-85.75 207.75,-85.75 ; 140.25,-84.8 140.25,-82.25 156.25,-82.25 ; 156.25,-96.25 156.25,-92.75 156.25,-89.25 156.25,-85.75 156.25,-82.25 ; 197.75,-96.25 197.75,-92.75 ; 207.75,-82.25 156.25,-82.25 ; -82.25,-101.25 212.75,-101.25 212.75,108.75 -82.25,108.75 -82.25,-101.25 ; -77.25,-96.25 207.75,-96.25 207.75,103.75 -77.25,103.75 -77.25,-96.25
  text "Board Name" at 141.25,-84.8 h3
  text ".ProjectTitle" at 157.25,-84.8 h3
  text "Author" at 141.25,-88.3 h3
  text "Pietro Lorefice" at 157.25,-88.3 h3
  text "Date" at 141.25,-91.9 h3
  text ".ProjectDate" at 157.25,-91.9 h3
  text "Revision" at 141.25,-95.5 h3
  text ".ProjectPCBRev" at 157.25,-95.5 h3
  text "A4" at 199.75,-95.5 h3
Bottom Titleblock:
  lines w0.3: -77.25,-92.75 -9.75,-92.75 ; -77.25,-89.25 -9.75,-89.25 ; -77.25,-85.75 -9.75,-85.75 ; -77.25,-82.25 -25.75,-82.25 ; -77.25,-77.25 -9.75,-77.25 ; -67.25,-96.25 -67.25,-92.75 ; -25.75,-96.25 -25.75,-92.75 -25.75,-89.25 -25.75,-85.75 -25.75,-82.25 ; -9.75,-96.25 -9.75,-84.25 ; -9.75,-84.8 -9.75,-82.25 ; 7.75,-96.25 207.75,-96.25 ; 16.75,-96.25 16.75,-77.25 -9.75,-77.25 ; -25.75,-82.25 -9.75,-82.25 ; -9.75,-82.25 -9.75,-77.25 ; 207.75,-96.25 -77.25,-96.25 -77.25,103.75 207.75,103.75 207.75,-96.25 ; -82.25,-101.25 212.75,-101.25 212.75,108.75 -82.25,108.75 -82.25,-101.25
  text ".ProjectTitle" at -26.75,-84.8 h3
  text "Board Name" at -10.75,-84.8 h3
  text "Pietro Lorefice" at -26.75,-88.3 h3
  text "Author" at -10.75,-88.3 h3
  text ".ProjectDate" at -26.75,-91.9 h3
  text "Date" at -10.75,-91.9 h3
  text "A4" at -69.25,-95.5 h3
  text ".ProjectPCBRev" at -26.75,-95.5 h3
  text "Revision" at -10.75,-95.5 h3

## Text inside footprints (layer, text, board x,y; h text height)
D1: Top Assembly "K" at 5.625,16.8 h0.5 r180
D2: Top Assembly "K" at 5.625,1.3 h0.5 r180